# EAGLE board controller (EAGLE 6.4)
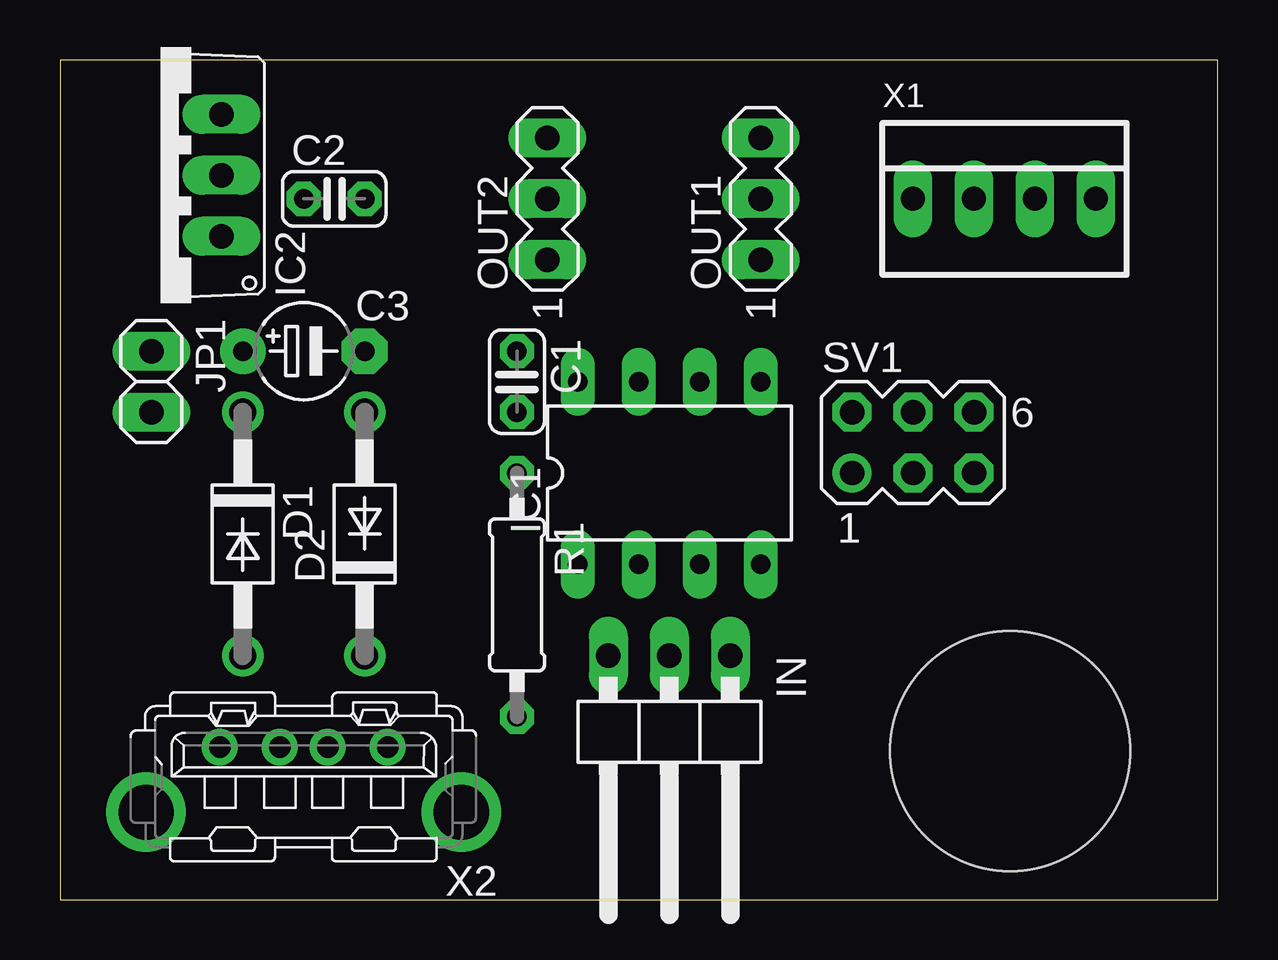
[diagram p0: board, top side]
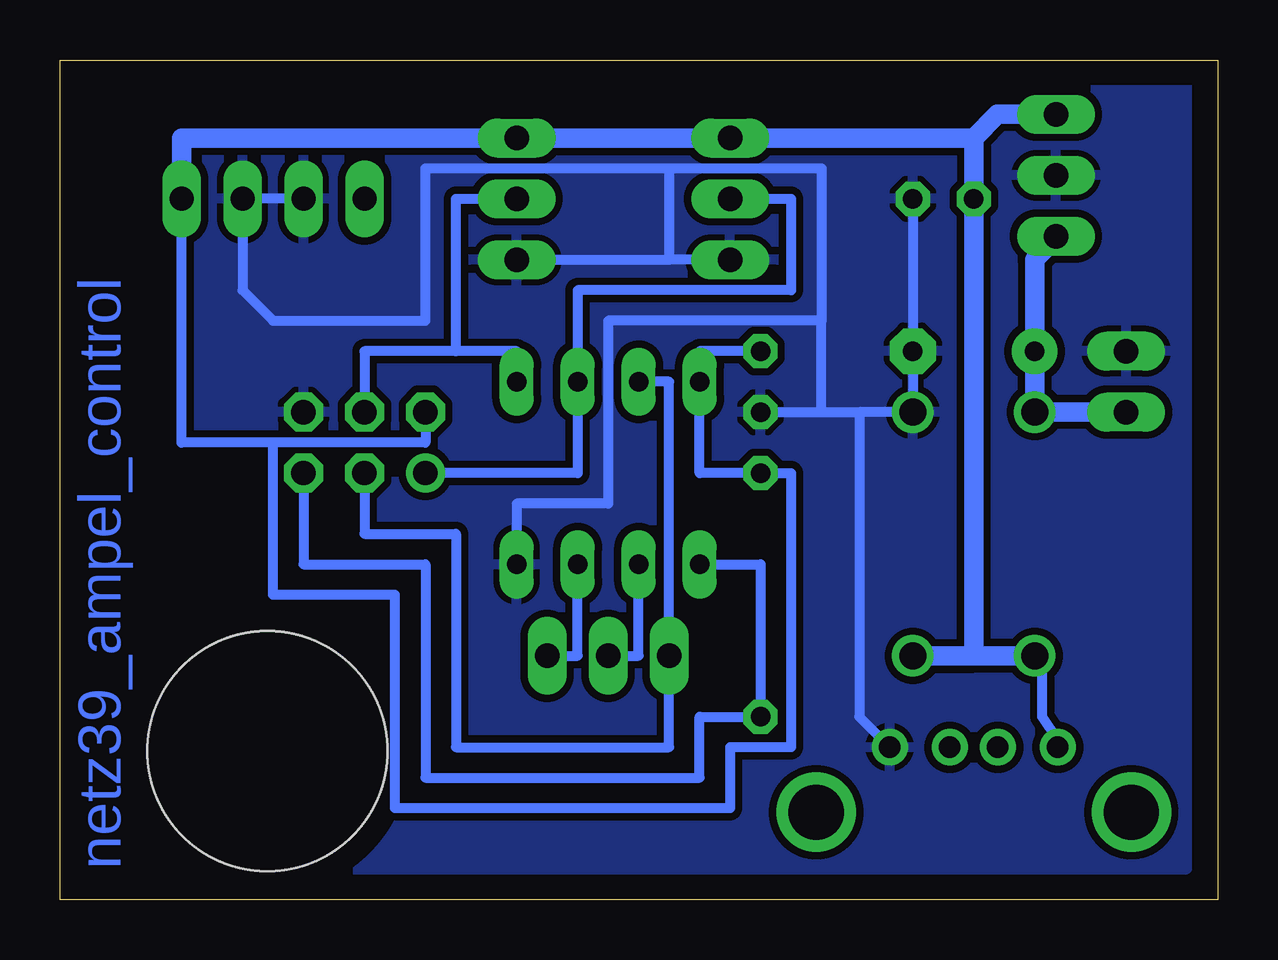
[diagram p1: board, bottom side, seen from below]

Size 48.25 x 35 mm. Coordinates in mm from the lower left corner, seen from the top.
Outline: 0,0 48.25,0 48.25,35 0,35 0,0
Copper layers (1*16): Top 0.035mm / dielectric 1.5mm / Bottom 0.035mm
Design rules "default *": minimum track width 10mil, minimum drill 24mil, track to track 8mil, track to pad 8mil, pad to pad 8mil, via to via 8mil, smd to smd 8mil, copper to edge 40mil, drill to drill 8mil, minimum pad ring 12mil, minimum via ring 8mil, stop-mask expansion 4mil, vias tented up to drill 0mil, thermal gap 10mil
Holes 10 mm at 39.6,6.19

## Footprints (pad centres in the part's own frame; a part is rotated, then mirrored left to right if it is on the bottom)
C025-024X044 = drill 0.813 octagon: 1 -1.27,0; 2 1.27,0
E5-4 = drill 0.813 pad 1.905: + -2.54,0 | drill 0.813 pad 1.905 octagon: - 2.54,0
DO41-10 = drill 1.118: A 5.08,0; C -5.08,0
DIL08 = drill 0.813 long: 1 -3.81,-3.81; 2 -1.27,-3.81; 3 1.27,-3.81; 4 3.81,-3.81; 5 3.81,3.81; 6 1.27,3.81; 7 -1.27,3.81; 8 -3.81,3.81
TO220V = drill 1.016 long: 1 -2.54,-2.54; 2 0,-2.54; 3 2.54,-2.54
1X03/90 = drill 1.016 long: 1 -2.54,-3.81; 2 0,-3.81; 3 2.54,-3.81
1X02 = drill 1.016 long: 1 -1.27,0; 2 1.27,0
MA03-1 = drill 1.016 long: 1 -2.54,0; 2 0,0; 3 2.54,0
0207/10 = drill 0.813 octagon: 1 -5.08,0; 2 5.08,0
MA03-2 = drill 1.016: 1 -2.54,-1.27 | drill 1.016 octagon: 2 -2.54,1.27; 3 0,-1.27; 4 0,1.27; 5 2.54,-1.27; 6 2.54,1.27
22-23-2041 = drill 1 long: 1 -3.81,0; 2 -1.27,0; 3 1.27,0; 4 3.81,0
KUSBVX = drill 0.9 pad 1.3: 1 3.5,0; 2 1,0; 3 -1,0; 4 -3.5,0 | drill 2.3 pad 2.8: M1 -6.57,2.71; M2 6.57,2.71

## Placement (x,y rotation side)
C1  10n  [C025-024X044]  19.05,21.59 270 top
C2  0.1µ  [C025-024X044]  11.43,29.21 0 top
C3  47µ  [E5-4]  10.16,22.86 0 top
D1  1N4004  [DO41-10]  7.62,15.24 270 top
D2  1N4004  [DO41-10]  12.7,15.24 90 top
IC1  ATtiny25  [DIL08]  25.4,17.78 0 top
IC2  7805TV  [TO220V]  4.19,30.19 90 top
IN  [1X03/90]  25.4,6.35 180 top
JP1  [1X02]  3.81,21.59 270 top
OUT1  RED  [MA03-1]  29.21,29.21 90 top
OUT2  GREEN  [MA03-1]  20.32,29.21 90 top
R1  10K  [0207/10]  19.05,12.7 270 top
SV1  ISP  [MA03-2]  35.56,19.05 0 top
X1  22-23-2041  [22-23-2041]  39.37,29.21 0 top
X2  KUSBVX  [KUSBVX]  10.16,6.35 180 top

## Library data of the parts
C1-C3 R1 = resistor
D1 D2 = diode
IC1 = atmel; OC_FARNELL: unknown; OC_NEWARK: unknown
IC2 = linear
IN JP1 = pinhead
OUT1 OUT2 SV1 = con-lstb; OC_FARNELL: unknown; OC_NEWARK: unknown
X1 = con-molex; MF: MOLEX; MPN: 22-23-2041; OC_FARNELL: 1462920; OC_NEWARK: 38C0355
X2 = con-kycon

## Nets
GND: C1.2 C2.2 C3.- D2.A IC1.4 IC2.2 JP1.1 OUT1.1 OUT2.1 SV1.6 X1.2 X1.3 X2.4
MISO: IC1.6 OUT2.2 SV1.1
MOSI: IC1.5 OUT1.2 SV1.4
N$1: IC1.2 IN.2
N$2: IC1.3 IN.1
RESET: IC1.1 R1.2 SV1.5
SCK: IC1.7 IN.3 SV1.3
VCC: C1.1 C2.1 D1.A D2.C IC1.8 IC2.3 OUT1.3 OUT2.3 R1.1 SV1.2 X1.4 X2.1
VEE: C3.+ D1.C IC2.1 JP1.2

## Tracks (layer width: path | path; a pad name or v marks a point on that pad's centre or on a via)
GND
  Bottom 0.406: C1.2 16.51,20.32 | 16.51,20.32 16.51,24.13 | 16.51,24.13 25.4,24.13 25.4,16.51 29.21,16.51 IC1.4 | OUT1.1 22.86,26.67 | OUT2.1 22.86,26.67 | 22.86,30.48 16.51,30.48 16.51,24.13 | 22.86,30.48 33.02,30.48 33.02,24.13 39.37,24.13 40.64,25.4 X1.3 X1.2 | 22.86,30.48 22.86,26.67 | X2.4 14.93,7.62 14.93,20.32 | C2.2 C3.- D2.A 14.93,20.32 | 16.51,20.32 14.93,20.32
  pour Bottom (isolate 0.305): 1.27,34.29 46.99,34.29 46.99,1.27 1.27,1.27
MISO
  Bottom 0.406: OUT2.2 17.78,29.21 17.78,25.4 26.67,25.4 IC1.6 26.67,17.78 SV1.1
MOSI
  Bottom 0.406: 31.75,22.86 31.75,29.21 OUT1.2 | IC1.5 29.21,22.86 31.75,22.86 | 31.75,22.86 35.56,22.86 SV1.4
N$1
  Bottom 0.406: IN.2 24.13,10.16 IC1.2
N$2
  Bottom 0.406: IN.1 26.67,10.16 IC1.3
RESET
  Bottom 0.406: IC1.1 19.05,13.97 R1.2 21.59,7.62 21.59,5.08 33.02,5.08 33.02,13.97 38.1,13.97 SV1.5
SCK
  Bottom 0.406: IC1.7 22.86,21.59 IN.3 22.86,6.35 31.75,6.35 31.75,15.24 35.56,15.24 SV1.3
VCC
  Bottom 0.406: C1.1 21.59,22.86 IC1.8 21.59,17.78 R1.1 17.78,17.78 17.78,6.35 20.32,6.35 20.32,3.81 34.29,3.81 34.29,12.7 39.37,12.7 39.37,19.05 | 39.37,19.05 43.18,19.05 X1.4 | SV1.2 33.02,19.05 39.37,19.05 | X2.1 6.66,6.66 7.31,7.62 7.31,9.85 D1.A
  Bottom 0.813: X1.4 43.18,31.75 OUT1.3 OUT2.3 10.16,31.75 | D2.C 10.16,10.16 | D1.A 10.16,10.16 | 10.16,10.16 C2.1 10.16,31.75 | IC2.3 9.18,32.73 10.16,31.75
VEE
  Bottom 0.406: IC2.1 6.73,27.56
  Bottom 0.813: 6.73,27.56 7.62,26.67 C3.+ D1.C JP1.2

## Text on the board
Bottom: netz39_ampel_control